# Altium PCB HIGHSPEED_v0.PcbDoc (part 2 of 2)
Units mil, origin at the board's own origin, x right, y up, seen from the top; angles counter-clockwise.
Board outline 3290 x 2886.02 mil, 6 copper layers (Top Layer, GND_1, Signal Layer 1, POWER, GND_2, Bottom Layer), stack 61.654 mil thick; 160 components, 145 nets, 569 pads, 305 vias.
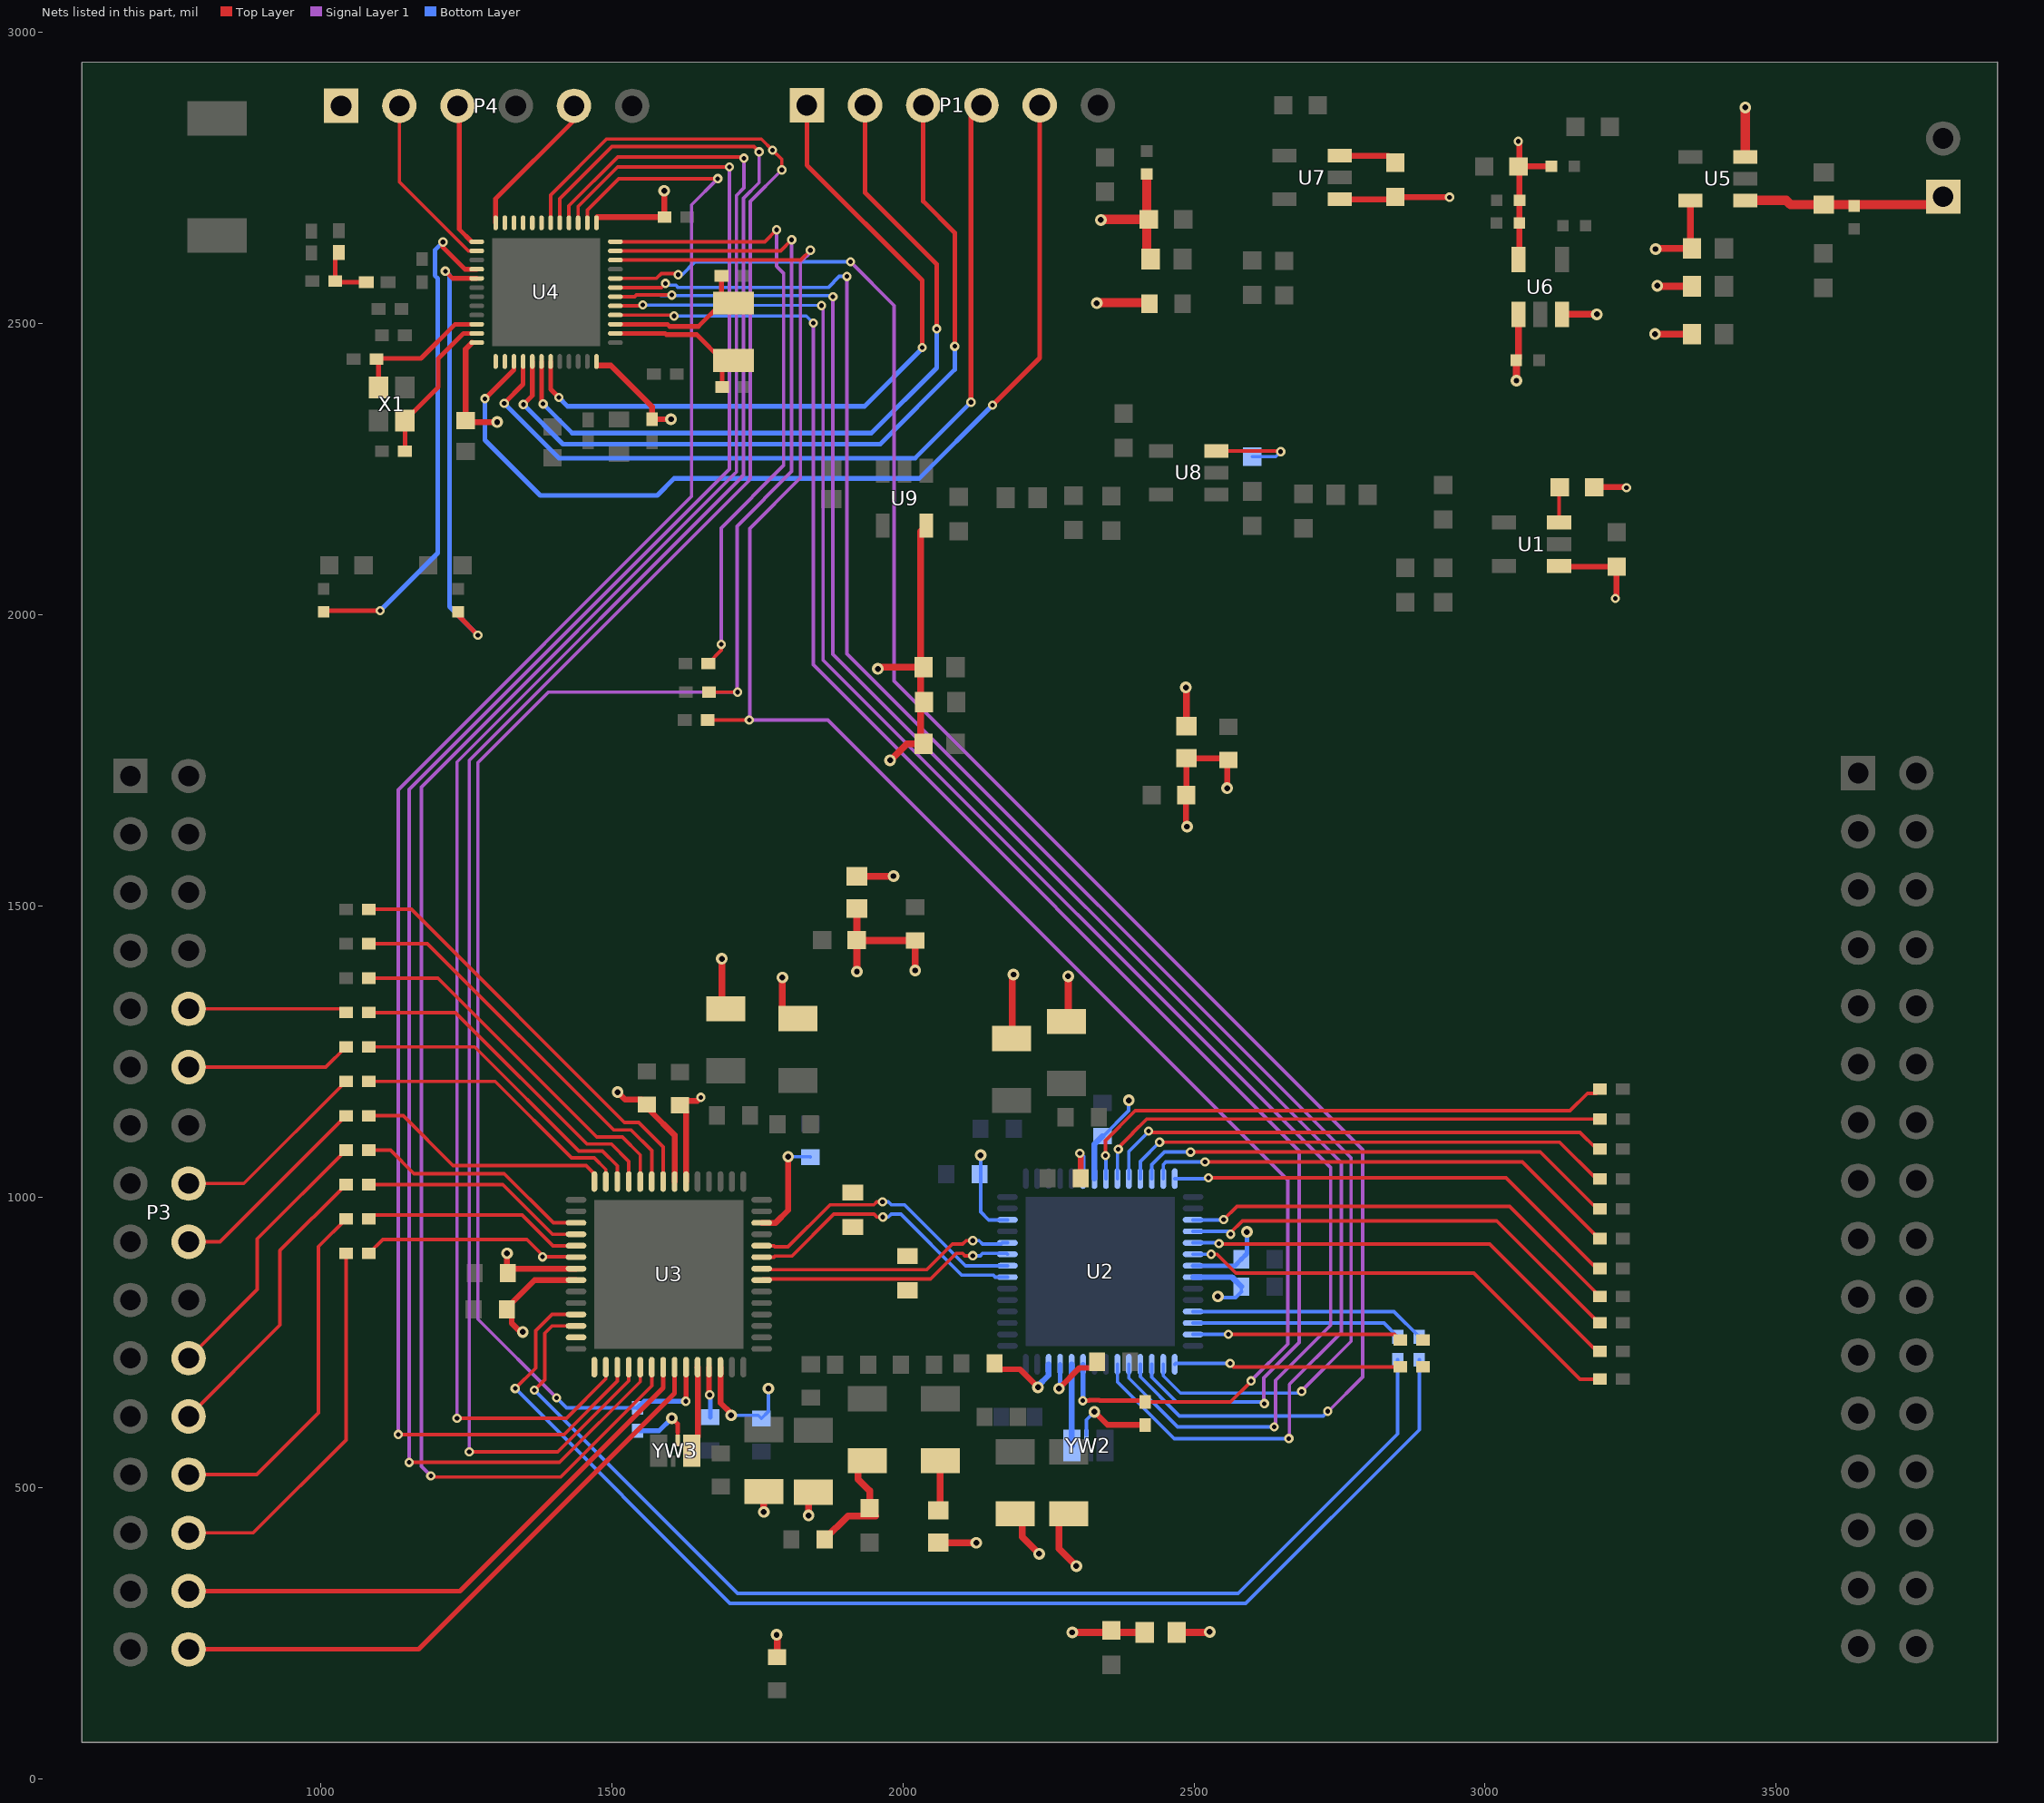
[diagram p6: the nets of this part, all layers, seen from the top]

## Via types
v1: diameter 16, hole 8, Top Layer to Bottom Layer, tented both sides, 135 vias
v2: diameter 19.68, hole 7.87, Top Layer to Bottom Layer, 72 vias
v3: diameter 20, hole 10, Top Layer to Bottom Layer, tented both sides, 60 vias
v4: diameter 25.98, hole 12.99, Top Layer to Bottom Layer, 16 vias
v5: diameter 16, hole 8, Top Layer to Bottom Layer, 14 vias
v6: diameter 20, hole 10, Top Layer to Bottom Layer, 8 vias

## Nets (pads, with @x,y where several pads share a name; then routed paths per layer and width w, separated by ;. In a path a pad name is that pad's centre, name@x,y a point inside that pad or via, vN(x,y) a via of type N, cw(c..) or ccw(c..) an arc to the next point about the centre after c; other vN are vias at no path point) (continued)
NetP3_10: P3.10 R35.2 | length 272.9
  Top Layer w6: P3.10@773,1323 1036.98,1323 R35.2@1043.31,1316.66
NetP3_12: P3.12 R36.2 | length 284.6
  Top Layer w6: P3.12@773,1223 1008.75,1223 R36.2@1043.31,1257.57
NetP3_16: P3.16 R39.2 | length 343
  Top Layer w6: P3.16@773,1023 867.84,1023 R39.2@1043.31,1198.47
NetP3_18: P3.18 R40.2 | length 359.9
  Top Layer w6: P3.18@773,923 826.94,923 R40.2@1043.31,1139.38
NetP3_22: P3.22 R34.1 | length 469.3
  Top Layer w6: P3.22@773,723 891,841 891,927.97 R34.1@1043.32,1080.28
NetP3_24: P3.24 R31.1 | length 510.2
  Top Layer w6: P3.24@773,623 930,780 930,907.87 R31.1@1043.32,1021.19
NetP3_26: P3.26 R28.1 | length 619.6
  Top Layer w6: P3.26@773,523 890,523 996,629 996,914.78 R28.1@1043.32,962.09
NetP3_28: P3.28 R25.1 | length 657
  Top Layer w6: P3.28@773,423 884,423 1043.32,582.32 R25.1@1043.32,903
NetP3_30: P3.30 U3.49 | length 995.2
  Top Layer w8: P3.30@773,323 1239,323 1588.16,672.16 U3.49@1588.16,707.55
NetP3_32: P3.32 U3.50 | length 1061.7
  Top Layer w8: P3.32@773,223 1168,223 1607.84,662.84 U3.50@1607.84,707.55
NetR4_1: R4.1 U1.3 | length 59.4
  Top Layer w6: U1.3@3127.24,2158.4 R4.1@3127.24,2217.77
NetR5_1: R5.1 U8.3 | length 163.8
  Top Layer w6: U8.3@2538.24,2281.4 2647.6,2281.4 v1(2649,2280)
  Bottom Layer w6: R5.1@2600,2271.53 2640.53,2271.53 v1(2649,2280)
NetR13_1: R13.1 R45.1 U2.51 U4.10 | length 3257.4
  Top Layer w6: U4.10@1506.09,2609.12 1824.12,2609.12 v1(1841,2626) ; R45.1@1664.68,1819 v1(1736,1819) ; R13.1@2416,647.69 2562.68,647.69 2599,684 v1(2598,684)
  Top Layer w8: v1(2309,650) 2319.72,650 2320.72,651 2337.28,651 2338.28,650 2413.69,650 R13.1@2416,647.69
  Signal Layer 1 w6: v1(1736,1819) v1@1737,1819 ; v1(1841,2626) 1843,2624 1824,2605 1824,2235 1737,2148 v1@1737,1819 ; v1@2599,685 2599,685.14 2661,747.14 2661,1028.87 1870.87,1819 v1@1737,1819
  Bottom Layer w8: v1(2309,650) 2309.47,650.47 U2.51@2309.47,712.55
NetR14_1: R14.1 R44.1 U3.51 U4.11 | length 3111.7
  Top Layer w6: U4.11@1506.09,2624.87 1789.87,2624.87 v1(1809,2644) ; R44.1@1666.68,1867 v1(1716,1867)
  Top Layer w8: v1(1627,649) 1627.53,649.53 U3.51@1627.53,707.55
  Signal Layer 1 w6: v1(1405,655) 1270,790 1270,1746 1391,1867 v1@1715,1867 ; v1(1716,1867) v1@1715,1867 ; v1(1809,2644) 1809,2246 1715,2152 v1@1715,1867
  Bottom Layer w6: v1(1405,655) 1422.32,637.69 R14.1@1544,637.69
  Bottom Layer w8: R14.1@1544,637.69 1555.31,649 v1(1627,649)
NetR15_1: R15.1 U2.43 | length 390.4
  Top Layer w6: v1(2562,714) 2568,708 R15.1@2854.32,708
  Bottom Layer w6: U2.43@2466.95,712.55 2468.4,714 v1(2562,714)
NetR15_2: R15.2
NetR16_1: R16.1 U2.41 | length 360.1
  Top Layer w6: v1(2559,764) 2844.32,764 R16.1@2854.32,754
  Bottom Layer w6: U2.41@2498.45,763.73 2558.73,763.73 v1(2559,764)
NetR16_2: R16.2
NetR17_1: R17.1 U2.40 | length 361.4
  Bottom Layer w6: U2.40@2498.45,783.42 2826.27,783.42 R17.1@2850,759.69
NetR17_2: R17.2 U3.40 | length 2032.5
  Top Layer w6: v1(1367,668) 1385,686 1385,766 1397.42,778.42 U3.40@1438.55,778.42
  Bottom Layer w6: v1(1367,668) 1716,319 2576,319 2850,593 R17.2@2850,720.31
NetR18_1: R18.1 U2.39 | length 406.5
  Bottom Layer w6: U2.39@2498.45,803.1 2843.58,803.1 R18.1@2887,759.69
NetR18_2: R18.2 U3.39 | length 2144.3
  Top Layer w6: v1(1334,671) 1369,706 1369,770 1397.1,798.1 U3.39@1438.55,798.1
  Bottom Layer w6: v1(1334,671) 1703,302 2589,302 2887,600 R18.2@2887,720.31
NetR19_1: R19.1 U2.34 | length 787.7
  Top Layer w6: v1(2529.47,901.53) 2539.47,901.53 2572,869 2981,869 3163,687 R19.1@3197.3,687
  Bottom Layer w6: U2.34@2498.45,901.53 v1(2529.47,901.53)
NetR20_1: R20.1 U2.22 | length 942.5
  Top Layer w6: v1(2348,1071) 2348,1097 2399,1148 3146,1148 3176,1178 R20.1@3191,1178
  Bottom Layer w6: v1(2348,1071) 2348.84,1070.16 U2.22@2348.84,1031.45
NetR21_1: R21.1 U2.33 | length 781
  Top Layer w6: v1(2543,920) 2544,919 3008,919 3192,735 R21.1@3202.32,735
  Bottom Layer w6: U2.33@2498.45,921.21 2541.79,921.21 v1(2543,920)
NetR22_1: R22.1 U2.32 | length 793.6
  Top Layer w6: v1(2563,936) 2563,938.87 2583.13,959 3020,959 3195,784 R22.1@3206.32,784
  Bottom Layer w6: U2.32@2498.45,940.9 2558.1,940.9 v1(2563,936)
NetR23_1: R23.1 U2.23 | length 897.4
  Top Layer w6: v1(2370,1082) 2369.06,1082 2368.53,1082.53 2395,1109 2395,1110.04 2418.62,1133.67 R23.1@3191.31,1133.67
  Bottom Layer w6: U2.23@2368.53,1031.45 2368.53,1080.53 v1(2370,1082)
NetR24_1: R24.1 U3.22 | length 733.9
  Top Layer w6: R24.1@1082.68,1493.95 1155.67,1493.95 1521.62,1128 1546,1128 1588.16,1085.84 U3.22@1588.16,1026.45
NetR25_2: R25.2 U3.34 | length 380.2
  Top Layer w6: R25.2@1082.69,903 1106.68,927 1354,927 1381,900 v1(1381,897) 1438.08,897 U3.34@1438.55,896.53
NetR26_1: R26.1 U2.31 | length 772.7
  Top Layer w6: v1(2551,961) 2574,984 3042.22,984 R26.1@3197.22,829
  Bottom Layer w6: U2.31@2498.45,960.58 2550.58,960.58 v1(2551,961)
NetR27_1: R27.1 U2.24 | length 890.6
  Top Layer w6: v1(2422,1113) 2424,1111 3163,1111 3191.67,1082.33 R27.1@3204.32,1082.33
  Bottom Layer w6: U2.24@2388.21,1031.45 2388.21,1078.21 2422,1112 v1(2422,1113)
NetR28_2: R28.2 U3.33 | length 380.6
  Top Layer w6: R28.2@1082.69,962.09 1089.59,969 1346,969 1398.79,916.21 U3.33@1438.55,916.21
NetR29_1: R29.1 U2.25 | length 865.7
  Top Layer w6: v1(2441,1094) 3128,1094 3191,1031 R29.1@3204.32,1031
  Bottom Layer w6: U2.25@2407.9,1031.45 2407.9,1060.9 v1(2441,1094)
NetR30_1: R30.1 U3.23 | length 686
  Top Layer w6: R30.1@1082.68,1434.85 1183.15,1434.85 1503,1115 1533,1115 1568.47,1079.53 U3.23@1568.47,1026.45
NetR31_2: R31.2 U3.32 | length 391.2
  Top Layer w6: R31.2@1082.69,1021.19 1312.81,1021.19 1398.1,935.9 U3.32@1438.55,935.9
NetR32_1: R32.1 U2.26 | length 850
  Top Layer w6: v1(2494,1077) 3095,1077 3192.33,979.67 R32.1@3204.32,979.67
  Bottom Layer w6: U2.26@2427.58,1031.45 2427.58,1055.45 2449.14,1077 v1(2494,1077)
NetR33_1: R33.1 U3.24 | length 637.6
  Top Layer w6: R33.1@1082.68,1375.76 1201.24,1375.76 1474,1103 1518,1103 1548.79,1072.21 U3.24@1548.79,1026.45
NetR34_2: R34.2 U3.31 | length 407.5
  Top Layer w6: R34.2@1082.69,1080.28 1119.72,1080.28 1160,1040 1315,1040 1399.42,955.58 U3.31@1438.55,955.58
NetR35_1: R35.1 U3.25 | length 586.8
  Top Layer w6: R35.1@1082.68,1316.66 1231.34,1316.66 1457,1091 1499,1091 1529.1,1060.9 U3.25@1529.1,1026.45
NetR36_1: R36.1 U3.26 | length 538.4
  Top Layer w6: R36.1@1082.68,1257.57 1264.43,1257.57 1443,1079 1484,1079 1509.42,1053.58 U3.26@1509.42,1026.45
NetR37_1: R37.1 U2.27 | length 837.5
  Top Layer w6: v1(2519,1060) 3064,1060 3195.67,928.33 R37.1@3204.32,928.33
  Bottom Layer w6: U2.27@2447.27,1031.45 2447.27,1055.45 2451.82,1060 v1(2519,1060)
NetR38_1: R38.1 U2.28 | length 802.6
  Top Layer w6: v1(2525,1033) 3036,1033 3192,877 R38.1@3204.32,877
  Bottom Layer w6: U2.28@2466.95,1031.45 2523.45,1031.45 v1(2525,1033)
NetR39_1: R39.1 U3.27 | length 490.5
  Top Layer w6: R39.1@1082.68,1198.47 1299.53,1198.47 1431,1067 1470,1067 1489.73,1047.27 U3.27@1489.73,1026.45
NetR40_1: R40.1 U3.28 | length 442
  Top Layer w6: R40.1@1082.68,1139.38 1141.62,1139.38 1227,1054 1456,1054 1470.05,1039.95 U3.28@1470.05,1026.45
NetR41_1: R41.1 U4.29 | length 761.3
  Top Layer w8: v5(1214,2590) 1226.38,2577.62 U4.29@1267.91,2577.62 ; R41.1@1236,2005 1236,1999 v1(1270,1965)
  Bottom Layer w8: v5(1214,2590) 1221,2583 1221,2014 v1(1270,1965)
NetR42_1: R42.1 U4.28 | length 862.1
  Top Layer w8: R42.1@1005,2005 1007,2007 v1(1102,2007) ; v5(1210,2640) 1210,2631.19 1247.82,2593.37 U4.28@1267.91,2593.37
  Bottom Layer w8: v1(1102,2007) 1201,2106 1201,2577.54 1196,2582.54 1196,2626 v5(1210,2640)
NetR43_1: R43.1 U4.12 | length 1088.9
  Top Layer w6: U4.12@1506.09,2640.61 1762.61,2640.61 v1(1783,2661) ; R43.1@1665.68,1916 1665.68,1916.68 1688,1939 v1(1688,1949)
  Signal Layer 1 w6: v1(1688,1949) 1688,2149 1795,2256 1795,2586.63 1783,2598.63 v1(1783,2661)
NetR49_1: R49.1 U7.3 | length 100.7
  Top Layer w10: U7.3@2750.24,2788.4 2834.13,2788.4 R49.1@2846,2776.53
NetU2_44: U2.44 U4.7 | length 2992.1
  Top Layer w6: U4.7@1506.09,2561.87 1584.87,2561.87 v1(1592,2569)
  Signal Layer 1 w6: v1(1904,2581) 1904,1933.13 2770,1067.13 2770,752 v1@2684,666
  Bottom Layer w6: v1(1592,2569) 1594.99,2566.01 1610.16,2566.01 1614.17,2562 1871.71,2562 1890.71,2581 v1(1904,2581) ; U2.44@2447.27,712.55 2447.27,692.73 2477,663 2682,663 v1(2685,666)
NetU2_45: U2.45 U4.4 | length 2807.1
  Top Layer w6: U4.4@1506.09,2514.63 1605.37,2514.63 v1(1607,2513)
  Signal Layer 1 w6: v1(1846,2501) 1846,1914 2681,1079 2681,750.17 2620,689.17 v1@2620,645
  Bottom Layer w6: v1(1607,2513) 1834,2513 v1(1846,2501) ; U2.45@2427.58,712.55 2427.58,690.42 2470,648 2618,648 v1(2621,645)
NetU2_46: U2.46 U4.8 | length 3154.9
  Top Layer w6: U4.8@1506.09,2577.62 1576.58,2577.62 1584.96,2586 1612,2586 v1(1614,2584)
  Signal Layer 1 w6: v1(1910,2606) 1985,2531 1985,1886 2790,1081 2790,691 v1@2731,632
  Bottom Layer w6: v1(1614,2584) 1621,2584 1643,2606 v1(1910,2606) ; U2.46@2407.9,712.55 2407.9,691.1 2475,624 2722,624 v1(2730,632)
NetU2_47: U2.47 U4.5 | length 2991.5
  Top Layer w6: U4.5@1506.09,2530.38 1551.38,2530.38 v1(1553,2532)
  Signal Layer 1 w6: v1(1860,2531) 1863,2528 1863,1922 2735,1050 2735,780 2640,685 2640,607 v1(2638,605)
  Bottom Layer w6: v1(1553,2532) v1(1860,2531) ; U2.47@2388.21,712.55 2388.21,688.79 2472,605 v1(2638,605)
NetU2_48: U2.48 U4.6 | length 3139
  Top Layer w6: U4.6@1506.09,2546.13 1539.13,2546.13 1542.01,2549.01 v1(1603.12,2549.01)
  Signal Layer 1 w6: v1(1879.87,2546.13) 1879.87,1932.13 2753,1059 2753,767 2664,678 v1@2664,585
  Bottom Layer w6: v1(1603.12,2549.01) 1585.01,2549.01 1584,2548 1878,2548 v1(1879.87,2546.13) ; U2.48@2368.53,712.55 2368.53,682.47 2466,585 v1(2663,585)
NetU2_52: U2.52 YW2.3 | length 139.8
  Bottom Layer w10: U2.52@2289.79,712.55 2289.79,573.67 YW2.3@2290.46,573
NetU3_41: U3.41
NetU3_43: U3.43
NetU3_44: U3.44 U4.17 | length 3118.2
  Top Layer w6: v1(1234,620) 1422,620 1489.73,687.73 U3.44@1489.73,707.55 ; U4.17@1410.62,2673.09 1410.62,2714.62 1500,2804 1744,2804 v1(1753,2795)
  Signal Layer 1 w6: v1(1234,620) 1234,1747 1724,2237 1724,2238.06 1726,2240.06 1726,2715.03 1753,2742.03 v1(1753,2795)
NetU3_45: U3.45 U4.14 | length 3091.1
  Top Layer w6: v1(1133,592) 1417.86,592 1509.42,683.55 U3.45@1509.42,707.55 ; U4.14@1457.87,2673.09 1457.87,2694.87 1512,2749 v1(1682,2749)
  Signal Layer 1 w6: v1(1133,592) 1133,1699 1637,2203 1637,2704 v1(1682,2749)
NetU3_46: U3.46 U4.18 | length 3289.8
  Top Layer w6: v1(1255,562) 1407,562 1529.1,684.1 U3.46@1529.1,707.55 ; U4.18@1394.87,2673.09 1394.87,2720.87 1491,2817 1757,2817 v1(1776,2798) 1792,2782 v5(1792,2764)
  Signal Layer 1 w6: v1(1255,562) 1255,1750 1736,2231 1736,2233.09 1738,2235.09 1738,2710 v5(1792,2764)
NetU3_47: U3.47 U4.15 | length 3248
  Top Layer w6: v1(1152,544) 1410.14,544 1548.79,682.65 U3.47@1548.79,707.55 ; U4.15@1442.12,2673.09 1442.12,2701.12 1510,2769 v1(1702,2769)
  Signal Layer 1 w6: v1(1152,544) 1152,1700 1702,2250 v1(1702,2769)
NetU3_48: U3.48 U4.16 | length 3341.7
  Top Layer w6: v1(1189,521) 1191,519 1412,519 1568.47,675.47 U3.48@1568.47,707.55 ; U4.16@1426.37,2673.09 1426.37,2702.34 1510.03,2786 1725,2786 v1(1727,2784)
  Signal Layer 1 w6: v1(1189,521) 1173,537 1173,1704 1711,2242 ; 1711,2242.03 1714,2245.03 1714,2720 1727,2733 v1(1727,2784)
NetU3_52: U3.52 YW3.3 | length 132.6
  Top Layer w10: YW3.3@1638,579 1647.54,588.54 1647.54,707.22 U3.52@1647.21,707.55
NetU4_19: U4.19
NetU4_20: U4.20
NetU4_21: U4.21
NetU4_22: U4.22
NetU4_23: U4.23
P0.00/XL1: C4.1 U4.2 X2.1 | length 249.2
  Top Layer w8: U4.2@1506.09,2483.13 1591.61,2483.13 1593.75,2481 1645.79,2481 1690,2436.79 1689.32,2436.1 C4.1@1689.32,2391
P0.01/XL2: C7.1 U4.3 X2.2 | length 248.2
  Top Layer w8: U4.3@1506.09,2498.88 1595.66,2498.88 1599.54,2495 1648.79,2495 1689,2535.21 1688.32,2535.9 C7.1@1688.32,2582
P0.21/RESET: P4.5 U4.24 | length 256.7
  Top Layer w8: U4.24@1300.39,2673.09 1300.39,2714.39 1435,2849 P4.5@1435,2874
P0.25: U4.37
P0.26: U4.38
P0.27: P1.5 U4.39 | length 1679.7
  Top Layer w8: v1(1282,2371) 1331.88,2420.88 U4.39@1331.88,2434.91 ; v1(2154,2360) 2235,2441 P1.5@2235,2875
  Bottom Layer w8: v1(1282,2371) 1282,2300 1377,2205 1578,2205 1607,2234 2028,2234 v1(2154,2360)
P0.28/AIN4: P1.4 U4.40 | length 1483.6
  Top Layer w8: v1(1315,2363) 1347.63,2395.63 U4.40@1347.63,2434.91 ; v1(2117,2365) 2117,2857 P1.4@2135,2875
  Bottom Layer w8: v1(1315,2363) 1409,2269 2021,2269 v1(2117,2365)
P0.29/AIN5: P1.3 U4.41 | length 1378.8
  Top Layer w8: v1(1348,2361) 1363.38,2376.38 U4.41@1363.38,2434.91 ; P1.3@2035,2875 2035,2710 2089,2656 v1(2089,2461)
  Bottom Layer w8: v1(1348,2361) 1416,2293 1961,2293 2089,2421 v1(2089,2461)
P0.30/AIN6: P1.2 U4.42 | length 1319.1
  Top Layer w8: U4.42@1379.13,2434.91 1379.13,2364.87 v1(1382,2362) ; P1.2@1935,2875 1935,2725 2058,2602 v1(2058,2491)
  Bottom Layer w8: v1(1382,2362) 1432,2312 1946,2312 2058,2424 v1(2058,2491)
P0.31/AIN7: P1.1 U4.43 | length 1239.8
  Top Layer w8: U4.43@1394.87,2434.91 1394.87,2387.13 v1(1409,2373) ; P1.1@1835,2875 1835,2772 2033,2574 v1(2033,2459)
  Bottom Layer w8: v1(1409,2373) 1424,2358 1934,2358 2034,2458 v1(2033,2459)
RF: L3.2 XX1.1 XX2.1 | length 107.9
  Top Layer w8: XX1.1@1021.84,2570.97 L3.2@1078.45,2570.97 ; XX2.1@1024.81,2621.11 XX1.1@1024.81,2573 XX1.1@1025.84,2571.97 ; XX2.1@1029.81,2621.11 XX2.1@1031,2622.3
RX_N: R2.2 U2.9 U3.7 | length 445
  Top Layer w6: U3.7@1757.45,857.16 1759.29,859 2047.63,859 2091.63,903 2102.5,903 2106.5,899 v5(2120,899)
  Bottom Layer w6: v5(2120,899) 2133,899 2137,903 2178.08,903 U2.9@2179.55,901.53
RX_P: R2.1 U2.10 U3.8 | length 448
  Top Layer w6: U3.8@1757.45,876.84 1768.16,876.84 1770,875 2041,875 2085,919 2102.5,919 2108.5,925 v5(2120,925) v5@2121,925
  Bottom Layer w6: v5(2120,925) 2131,925 2137,919 2169,919 2171.21,921.21 U2.10@2179.55,921.21
SWDCLK: P4.3 U4.25 | length 250.8
  Top Layer w8: P4.3@1238,2874 1238,2662 1259.39,2640.61 U4.25@1267.91,2640.61
SWDIO: P4.2 U4.26 | length 312.6
  Top Layer w6: P4.2@1135,2874 1135,2743.44 1253.58,2624.87 U4.26@1267.91,2624.87
TX_N: R1.2 U2.7 U3.9 | length 501.5
  Top Layer w6: U3.9@1757.45,896.53 1778.17,896.53 1780.01,898.37 1809.33,898.37 1881.36,970.4 1950.3,970.4 1955.2,965.5 v5(1965.6,965.5)
  Bottom Layer w6: v5@1965.7,965.4 1975.1,965.4 1980.1,970.4 1996.3,970.4 2101,865.7 2155.29,865.7 2158.83,862.16 U2.7@2179.55,862.16
TX_P: R1.1 U2.8 U3.10 | length 500.4
  Top Layer w6: U3.10@1757.45,916.21 1778.17,916.21 1780.01,914.37 1802.7,914.37 1874.73,986.4 1950.1,986.4 1955.2,991.5 v5(1964.9,991.5)
  Bottom Layer w6: v5(1964.9,991.5) 1975.1,991.5 1980.2,986.4 2002.93,986.4 2107.63,881.7 2158.69,881.7 2158.83,881.84 U2.8@2179.55,881.84
VCC_5: C20.2 P5.1 R46.1 U5.1 U5.3 | length 443.4
  Top Layer w8: v3@3447,2872 3448,2872 v3(3447.24,2871.24) ; U5.3@3447.24,2786.4 U5.3@3455.4,2786.4 ; P5.1@3773.44,2704.44 P5.1@3787,2718
  Top Layer w16: U5.1@3447.24,2711.6 3517.4,2711.6 3524.56,2704.44 C20.2@3582,2704.44 P5.1@3773.44,2704.44 ; U5.3@3447.24,2786.4 v3(3447.24,2871.24)
VDD_1V2: C26.1 Cb20.2 Cb23.2 Cb26.2 Cb29.2 Cb35.2 Cb36.2 Cb39.2 Cb41.2 Cb43.2 L5.2 U2.12 U2.21 U2.36 U2.54 U3.12 U3.21 U3.36 U3.54 | length 1611.2
  Top Layer w10: Cb41.2@1319,806 1328,797 1328,783 1343,768 v6(1347,768) ; Cb41.2@1319,809 1367.16,857.16 U3.36@1438.55,857.16 ; v3(1510,1180) 1523,1167 1551.46,1167 Cb39.2@1560,1158.46 ; Cb39.2@1567,1157 1567,1147 1607.84,1106.16 U3.21@1607.84,1026.45 ; U3.54@1686.58,707.55 1687,707.13 1687,646 1705,628 v3(1705,625) ; U3.12@1757.45,955.58 1781.45,955.58 1803,977.14 v3(1803,1069) ; Cb36.2@2157.54,714 2167.54,704 2201,704 v3(2232,673) ; v3(2488,1636) 2486.53,1637.47 C26.1@2486.53,1690 2487,1690.47 L5.2@2487,1753.44 Cb43.2@2556.02,1753.44 ; v3(2557,1702) 2557,1748.46 Cb43.2@2559,1750.46
  Bottom Layer w6: v3(1705,625) 1751.54,625 Cb23.2@1757,619.54 1769,631.54 v3(1769,671) ; v3(1803,1069) 1841,1069 Cb29.2@1841,1068.46 ; v3(2133.46,1071.54) 2133.46,974.54 2147.42,960.58 U2.12@2179.55,960.58 ; Cb35.2@2343.73,1103.73 2388,1148 v3(2388,1166) ; v3(2541,829) 2542.75,827.25 2571.78,827.25 2581.53,837 2581.46,837 Cb20.2@2581.46,846
  Bottom Layer w10: v3(2232,673) 2232,675.3 2250.42,693.71 U2.54@2250.42,712.55 ; U2.21@2329.16,1031.45 2329,1031.61 2329,1090.46 Cb35.2@2343,1104.46 ; U2.36@2498.45,862.16 2565.3,862.16 Cb20.2@2581.46,846
VDD_1V2_ANALOG: C33.1 Cb46.2 L8.2 R63.2 R64.1 R65.1 R66.1 | length 638.1
  Top Layer w12: R66.1@1681,1313 1689,1321 v3(1689,1409) ; R64.1@1793,1306 v3(1793,1377) ; v3(1921,1387) C33.1@1921,1441 ; L8.2@1921,1495.44 C33.1@1921,1441 ; v3(2021,1389) Cb46.2@2021,1440.46 1921.54,1440.46 C33.1@1921,1441 ; R63.2@2188,1258.15 2188,1380 v3(2190,1382) ; R65.1@2284,1296 v3(2284,1379)
VDD_1V2_DGITAL: C31.1 Cb44.2 L6.2 R57.1 R58.1 R59.1 R60.1 | length 451
  Top Layer w12: v3(1761,459) R58.1@1761,493.85 ; v3(1783,248) 1786,245 1784,243 Cb44.2@1784,209.54 ; v3(1838,453) R57.1@1838,501 ; R60.1@2184,462 2205,441 2205,416 v3(2234,387) ; R59.1@2268,461 2268,396 v3(2298,366) ; v3(2291,252) 2361.53,252 L6.2@2415.44,252
VDD_1V2_FLL: C32.1 Cb45.2 L7.2 R61.1 R62.2 | length 282.5
  Top Layer w12: Cb45.2@1865.54,412 1905.54,452 C32.1@1953,452 ; R62.2@1923,552 1923,515 1943,495 C32.1@1943,465.53 ; L7.2@2061,461.56 2064,464.56 R61.1@2064,544
VDD_1V2_GENERAL: C28.2 C29.2 C30.2 L5.1 L6.1 L7.1 L8.1 U9.5 | length 774.7
  Top Layer w12: L8.1@1921,1550.56 1983.56,1550.56 v3(1984,1551) ; v3(1957,1907) 1960,1910 C29.2@2030.4,1910 ; v3(1978,1750) 1979,1750 2007,1778 C28.2@2035.44,1778 ; C28.2@2030.4,1783.04 C29.2@2030.4,1910 ; C29.2@2035.44,1910 C29.2@2030.4,1910 ; U9.5@2040.4,2152.76 2030.4,2142.76 C29.2@2030.4,1910 ; L7.1@2061,406.44 2061.44,406 v3(2126,406) ; L6.1@2470.56,252 2526,252 v3(2527,253) ; v3(2486,1875) 2487,1874 L5.1@2487,1808.56
VDD_1V8: C5.1 C8.1 C12.1 C15.1 Cb21.2 Cb22.2 Cb34.2 Cb37.2 Cb38.2 Cb40.2 Cb42.2 L4.2 P4.1 R13.2 R14.2 R48.1 U2.20 U2.35 U2.53 U3.20 U3.35 U3.53 U4.13 U4.36 U4.48 YW2.4 YW3.4 | length 1869.8
  Top Layer w6: YW3.4@1612.94,581.72 1612.94,596
  Top Layer w8: v3(1603,620) 1612.94,610.06 1612.94,596
  Top Layer w10: C5.1@1249,2333.57 1249,2456 U4.36@1260,2467 ; C5.1@1255.43,2333.57 1258,2331 v3(1303,2331) ; Cb40.2@1320,862 v6(1320,903) ; Cb40.2@1321.54,869 1329.39,876.84 U3.35@1438.55,876.84 ; U4.13@1475,2683 C8.1@1590.32,2683 1590.32,2727.68 v3(1590,2728) ; U4.48@1477,2428 1498,2428 1569,2357 C12.1@1569,2335.68 v3(1601.68,2335.68) ; U3.20@1627.53,1026.45 1627.53,1146.93 Cb38.2@1617,1157.46 1624.54,1165 1647,1165 v1(1653,1171) ; U3.53@1666.9,707.55 1666.9,661.1 v1(1668,660) ; v3(2268,671) 2303.27,706.27 2322.73,706.27 Cb21.2@2333.46,717 ; v1(2304,1075) 2305.54,1073.46 Cb34.2@2305.54,1032 ; v3(2329,631) 2351.69,608.31 R13.2@2416,608.31
  Top Layer w16: v3(2333,2535) 2334,2536 Cb42.2@2415.47,2536 ; v3(2340,2678) 2341,2679 C15.1@2419,2679 ; R48.1@2419,2757 C15.1@2419,2679 ; C15.1@2422.47,2679 C15.1@2419,2679 ; L4.2@2425.44,2611 2419,2617.44 C15.1@2419,2679
  Bottom Layer w6: YW2.4@2315.06,590.72 2315.06,617.06 v3(2329,631)
  Bottom Layer w8: R14.2@1544,598.31 1581.31,598.31 v3(1603,620) ; v1(1668,660) 1669,659 Cb22.2@1669,621.54 ; v3(2268,671) 2270.1,673.1 U2.53@2270.1,712.55 ; v1(2304,1075) 2309.47,1069.53 U2.20@2309.47,1031.45 ; U2.35@2498.45,881.84 2570.3,881.84 Cb37.2@2581.46,893 2591,902.54 v3(2591,940)
VDD_3V3: C17.1 C18.2 C19.1 C40.1 R4.2 R47.1 R49.2 U1.1 U6.5 U7.1 | length 716.9
  Top Layer w10: U7.1@2750.24,2713.6 2842.13,2713.6 R49.2@2846,2717.47 2938.53,2717.47 v1(2939,2717) ; v1(3057,2813) 3059.37,2810.63 C19.1@3059.37,2770 ; C19.1@3057.53,2770 3059,2768.53 C17.1@3059,2673 3059,2611.65 U6.5@3057.6,2610.24 ; C18.2@3059.37,2712 C19.1@3059.37,2770 ; R47.1@3114,2770 C19.1@3059.37,2770 ; U1.1@3128.37,2082.47 C40.1@3226,2082.47 3226,2030 v1(3224,2028) ; R4.2@3187.53,2219 3242,2219 v1(3243,2218)
VDD_3V7: C21.2 C22.2 C23.2 C24.2 U5.5 U6.1 U6.3 | length 441.4
  Top Layer w12: v3(3054,2402) 3054,2437.37 3057.6,2440.97 U6.1@3057.6,2515.76 ; U6.3@3132.4,2515.76 3132.65,2516 v3(3192,2516) v3@3191.76,2515.76 ; v3(3292,2482) C22.2@3355.44,2482 ; v3(3293,2628) 3294,2629 C24.2@3355.44,2629 ; v3(3296,2565) 3297,2565 3298,2564 C23.2@3355.44,2564 ; C24.2@3352.76,2631.68 U5.5@3352.76,2711.6
XC1: C6.1 U4.34 X1.1 | length 242.4
  Top Layer w8: X1.1@1099.3,2390.54 1099.3,2440 1172,2440 1230.88,2498.88 U4.34@1267.91,2498.88
XC2: C3.1 U4.35 X1.3 | length 266.6
  Top Layer w8: C3.1@1144.56,2281 X1.3@1144.56,2333.44 ; X1.3@1144.58,2333.46 1202,2390.88 1202,2440 1245.13,2483.13 U4.35@1267.91,2483.13
pads on no net: A1.2 U2.1 U2.2 U2.3 U2.4 U2.6 U2.11 U2.13 U2.14 U2.29 U2.30 U2.37 U2.38 U2.42 U3.1 U3.2 U3.3 U3.4 U3.6 U3.11 U3.13 U3.14 U3.29 U3.30 U3.37 U3.38 U3.42 U4.9 U4.27 U4.44 U5.4 U9.4 YW2.1 YW3.1
copper on no net: | length 11.3
  Top Layer w6: 8141.72,5359.97 8149.69,5352

## Polygon pours and split planes (outlines as drawn)
GND on Bottom Layer "Bottom Layer-No Net" (solid, remove dead copper, pour order 8): 980,2920 3835,2920 3851,2904 3851,109 3845,103 3837,95 3833,95 627,95 617,105 617,108 617,2383 616,2384 641,2409 641,2410 966,2410 967,2409 975,2417 975,2909 975,2915 980,2920
VDD_1V2_FLL on Top Layer "Top Layer-No Net" (solid, pour order 5): 1914,449 2083,449 2083,536 1914,536
GND on Top Layer "Bottom Layer-No Net" (solid, remove dead copper, pour order 7): 980,2920 3835,2920 3851,2904 3851,109 3845,103 3837,95 3833,95 627,95 617,105 617,108 617,2383 616,2384 641,2409 641,2410 966,2410 967,2409 975,2417 975,2909 975,2915 980,2920
GND on Signal Layer 1 "Bottom Layer-No Net" (solid, remove dead copper, pour order 6): 618,2410 3848,2410 3848,95 618,95
VDD_1V8 on GND_2 (split plane): 3859.9,83.1 610.1,83.1 610.1,2410 962,2410 962,2928.9 3859.9,2928.92
GND on GND_1 (split plane): 3859.9,83.1 610.1,83.1 610.1,2410 962,2410 962,2928.9 3859.9,2928.92
VDD_3V3 on POWER (split plane): 3401.92,2723.08 3083,2723.08 3081.44,2722.77 3080.12,2721.88 3010.12,2651.88 3009.23,2650.56 3008.92,2649 3008.92,2388 3009.23,2386.44 3010.12,2385.12 3047.12,2348.12 3048.44,2347.23 3050,2346.92 3312.31,2346.92 3333.12,2326.12 3490.12,2169.12 3491.44,2168.23 3493,2167.92 3859.9,2167.92 3859.9,1967.08 2873.08,1967.08 2873.08,2620 2873.08,2928.31 2873.68,2928.91 3401.92,2928.92
VDD_3V7 on POWER (split plane): 3402.23,2714.44 3403.12,2713.12 3453.12,2663.12 3453.78,2662.67 3454.44,2662.23 3456,2661.92 3859.9,2661.92 3859.9,2176.08 3494.69,2176.08 3338.88,2331.88 3316.88,2353.88 3315.56,2354.77 3314,2355.08 3051.69,2355.08 3017.08,2389.69 3017.08,2647.31 3084.69,2714.92 3402,2714.92 3402.13,2714.95
VCC_5 on POWER (split plane): 3859.9,2670.08 3457.69,2670.08 3410.08,2717.69 3410.08,2928.92 3859.9,2928.92
VDD_1V2_DGITAL on POWER (split plane): 1857.92,335 1858.23,333.44 1859.12,332.12 1860.44,331.23 1862,330.92 2159,330.92 2160.56,331.23 2161.88,332.12 2176.88,347.12 2177.77,348.44 2178.08,350 2178.08,434.92 2337.92,434.92 2337.92,227.69 2297.31,187.08 1627.69,187.08 1597.08,217.69 1597.08,476.31 1610.69,489.92 1857.92,489.92
VDD_1V2_ANALOG on POWER (split plane): 2296.92,1276.08 1648.08,1276.08 1648.08,1436.92 2296.92,1436.92
VDD_1V8 on POWER (split plane): 2864.92,2620 2864.92,2421.08 1828,2421.08 1826.44,2420.77 1825.12,2419.88 1649.12,2243.88 1413.12,2007.88 1412.23,2006.56 1411.92,2005 1411.92,1955.92 1411.92,1200 1411.92,1105 1411.92,947 1411.92,910 1412.23,908.44 1413.12,907.12 1414.44,906.23 1416,905.92 1543,905.92 1544.56,906.23 1545.88,907.12 1623.88,985.12 1624.33,985.78 1624.77,986.44 1625.08,988 1625.08,1130.92 1672.92,1130.92 1672.92,774.08 1633.69,774.08 1574.13,833.63 1537.88,869.88 1536.56,870.77 1535,871.08 1330,871.08 1328.44,870.77 1327.12,869.88 1326.23,868.56 1325.92,867 1325.92,752 1326.23,750.44 1327.12,749.12 1435.12,641.12 1435.78,640.67 1436.44,640.23 1438,639.92 2234,639.92 2235.56,640.23 2236.88,641.12 2265.88,670.12 2266.77,671.44 2267.08,673 2267.08,774.5 2266.77,776.06 2265.88,777.38 2243.08,800.19 2243.08,1072.31 2265.69,1094.92 2326.92,1094.92 2326.92,984 2327.23,982.44 2328.12,981.12 2359.12,950.12 2360.44,949.23 2362,948.92 2606.92,948.92 2606.92,875.08 2454,875.08 2452.44,874.77 2451.12,873.88 2427.12,849.88 2347.12,769.88 2346.23,768.56 2345.92,767 2345.92,665 2345.92,563.08 1291.08,563.08 1291.08,1913 1291.08,1971 1290.77,1972.56 1290.33,1973.22 1289.88,1973.88 983.08,2280.69 983.08,2291 982.98,2291.5 983.08,2292 983.08,2928.9 2864.92,2928.91
VDD_1V2 on POWER (split plane): 2578.92,1201 2579.23,1199.44 2580.12,1198.12 2741.92,1036.31 2741.92,728.69 2576.31,563.08 2354.08,563.08 2354.08,665 2354.08,765.31 2432.88,844.12 2455.69,866.92 2611,866.92 2612.56,867.23 2613.88,868.12 2614.77,869.44 2615.08,871 2615.08,953 2614.77,954.56 2613.88,955.88 2612.56,956.77 2611,957.08 2363.69,957.08 2335.08,985.69 2335.08,1099 2334.77,1100.56 2333.88,1101.88 2332.56,1102.77 2331,1103.08 2264,1103.08 2262.44,1102.77 2261.12,1101.88 2236.12,1076.88 2235.23,1075.56 2234.92,1074 2234.92,798.5 2235.23,796.94 2236.12,795.62 2258.92,772.81 2258.92,674.69 2232.31,648.08 1439.69,648.08 1334.08,753.69 1334.08,862.92 1533.31,862.92 1568.37,827.87 1629.12,767.12 1629.78,766.67 1630.44,766.23 1632,765.92 1677,765.92 1678.56,766.23 1679.88,767.12 1680.77,768.44 1681.08,770 1681.08,1135 1680.77,1136.56 1679.88,1137.88 1678.56,1138.77 1677,1139.08 1621,1139.08 1619.44,1138.77 1618.12,1137.88 1617.23,1136.56 1616.92,1135 1616.92,989.69 1541.31,914.08 1420.08,914.08 1420.08,947 1420.08,1195.92 2090.56,1195.92 2151.37,1135.12 2152.69,1134.23 2154.25,1133.92 2337,1133.92 2338.56,1134.23 2339.88,1135.12 2405.88,1201.12 2406.77,1202.44 2407.08,1204 2407.08,1477 2406.77,1478.56 2405.88,1479.88 2365.88,1519.88 2308.08,1577.69 2308.08,1748.31 2330.69,1770.92 2578.92,1770.92
VDD_1V2_GENERAL on POWER (split plane): 2864.92,2292 2864.92,1963 2865.23,1961.44 2866.12,1960.12 2867.44,1959.23 2869,1958.92 3859.9,1958.92 3859.9,83.1 1291.08,83.1 1291.08,554.92 2578,554.92 2579.56,555.23 2580.88,556.12 2748.88,724.12 2749.33,724.78 2749.77,725.44 2750.08,727 2750.08,1038 2749.77,1039.56 2748.88,1040.88 2587.08,1202.69 2587.08,1775 2586.77,1776.56 2585.88,1777.88 2584.56,1778.77 2583,1779.08 2329,1779.08 2327.44,1778.77 2326.12,1777.88 2301.12,1752.88 2300.23,1751.56 2299.92,1750 2299.92,1576 2300.23,1574.44 2301.12,1573.12 2360.12,1514.12 2398.92,1475.31 2398.92,1205.69 2335.31,1142.08 2155.94,1142.08 2095.13,1202.88 2093.81,1203.77 2092.25,1204.08 1420.08,1204.08 1420.08,1955.92 1420.08,2003.31 1654.88,2238.12 1829.69,2412.92 2864.92,2412.92
GND on POWER (split plane): 974.92,2292 975.02,2291.5 974.92,2291 974.92,2279 975.23,2277.44 976.12,2276.12 1282.92,1969.31 1282.92,1913 1282.92,83.1 610.1,83.1 610.1,2410 962,2410 962,2928.9 974.92,2928.9

## Keep-outs
Keep-Out Layer:
  lines w10: 591,63 591,2948.99 3880,2948.99 3880,63 591,63

## Other copper
Top Layer:
  region net TX_P: 1896,996 1932,996 1932,986 1897,986 1896,986
  region net TX_N: 1896.5,970 1932.5,970 1932.5,960 1897.5,960 1896.5,960
  region net RX_P: 1990,887 2026,887 2026,875.5 1990,875.5
  region net RX_N: 1990,858 2026,858 2026,848 1991,848 1990,848
  pour cut-out: 962,2410 589,2410 589,2948.99 962,2948.99
  region net NetA1_1: 815.37,2563 963,2563 963,2582.69 815.37,2582.69
  region net NetA1_1: 835,2563.18 835,2680.82 815.31,2680.82 815.31,2563.18
  pour cut-out: 2489,1087 2605,971 2605,590 1432.34,590 1406,616.34 1406,1087
Signal Layer 1:
  pour cut-out: 962,2410 589,2410 589,2948.99 962,2948.99
Bottom Layer:
  pour cut-out: 962,2410 589,2410 589,2948.99 962,2948.99
  pour cut-out: 2487,1094 2603,978 2603,597 1430.34,597 1404,623.34 1404,1094
GND_1 (plane layer: these items are gaps in the copper):
  pour cut-out: 962,2410 589,2410 589,2948.99 962,2948.99
  lines w10: 1603.37,2334 1606,2334
POWER (plane layer: these items are gaps in the copper):
  pour cut-out: 962,2410 589,2410 589,2948.99 962,2948.99
  lines w8: 589,2945 979,2945 979,2292 ; 979,2291 979,2279 1287,1971 1287,1913 1287,63 ; 1287,559 2578,559 2746,727 2746,1038 2583,1201 2583,1775 2329,1775 2304,1750 2304,1576 2363,1517 2403,1477 2403,1204 2337,1138 2154.25,1138 2092.25,1200 1416,1200 1416,1105 ; 2134,559 2350,559 2350,665 2350,767 2430,847 2454,871 2611,871 2611,953 2362,953 2331,984 2331,1099 2264,1099 2239,1074 2239,798.5 2263,774.5 2263,673 2234,644 1692,644 1602,644 1438,644 1330,752 1330,867 1535,867 1571.25,830.75 1632,770 1644,770 1677,770 1677,1135 1621,1135 1621,988 1543,910 1416,910 1416,947 1416,1955.92 1416,2005 1652,2241 1828,2417 2864.92,2417 ; 2869,2292 2869,2930 2886,2947 ; 2869,2620 2869,1963 3882,1963 ; 3402,2719 3083,2719 3013,2649 3013,2388 3050,2351 3314,2351 3336,2329 3493,2172 3880,2172 ; 3406,2947 3406,2716 3456,2666 3880,2666 ; 1593,216 1593,478 1609,494 1862,494 1862,335 2159,335 2174,350 2174,439 2342,439 2342,226 2299,183 1626,183 1593,216 ; 1644,1272 2301,1272 2301,1441 1644,1441 1644,1272
GND_2 (plane layer: these items are gaps in the copper):
  pour cut-out: 962,2410 589,2410 589,2948.99 962,2948.99

## Silkscreen, mask and mechanical layers (free items; w line width, h text height)
Top Overlay:
  text "3.3VDD" at 2961,2875 h30
  text "1.8VDD" at 2020,2651 h30
  text "3.7VDD" at 3475,2328 h30
  text "VDD_1.2_ANALOG" at 1599,1549 h30
  text "VDD_1.2_ANALOG" at 2141,1524 h30
  text "TX" at 1672,1365 h30
  text "RX" at 1807,1344 h30
  text "TX" at 2266,1334 h30
  text "RX" at 2164,1312 h30
  text "TX" at 1742,628 h30
  text "RX" at 1792,627 h30
  text "RX" at 2156,404 h30
  text "TX" at 2307,402 h30
  text "FLL_MEASURE" at 2010,175 h30 r90
  text "VDD_DIGITAL_TX_RX" at 1748,148 h30 r90
  text "VDD_DIGITAL TX_RX" at 2249,105 h30 r90
Mechanical 1:
  drawing of 214 lines, arcs and shapes, not listed
Mechanical 3:
  lines w10: 591,63 3880,63 3880,2948.99 591,2948.99 591,63

## Text inside footprints (layer, text, board x,y; h text height)
P2: Top Overlay "32" at 3721,168 h30 r270; Top Overlay "31" at 3621,168 h30 r270; Top Overlay "1" at 3621,1828 h30 r270; Top Overlay "2" at 3721,1828 h30 r270
P3: Top Overlay "32" at 753,163 h30 r270; Top Overlay "31" at 653,163 h30 r270; Top Overlay "1" at 653,1823 h30 r270; Top Overlay "2" at 753,1823 h30 r270